# Altium PCB LPC55S69_MINI.PCBdoc (part 2 of 2)
Units mil, origin at the board's own origin, x right, y up, seen from the top; angles counter-clockwise.
Board outline 1610.03 x 1685.03 mil, 2 copper layers (Top Layer, Bottom Layer), stack 31.2 mil thick; 66 components, 51 nets, 267 pads, 110 vias.
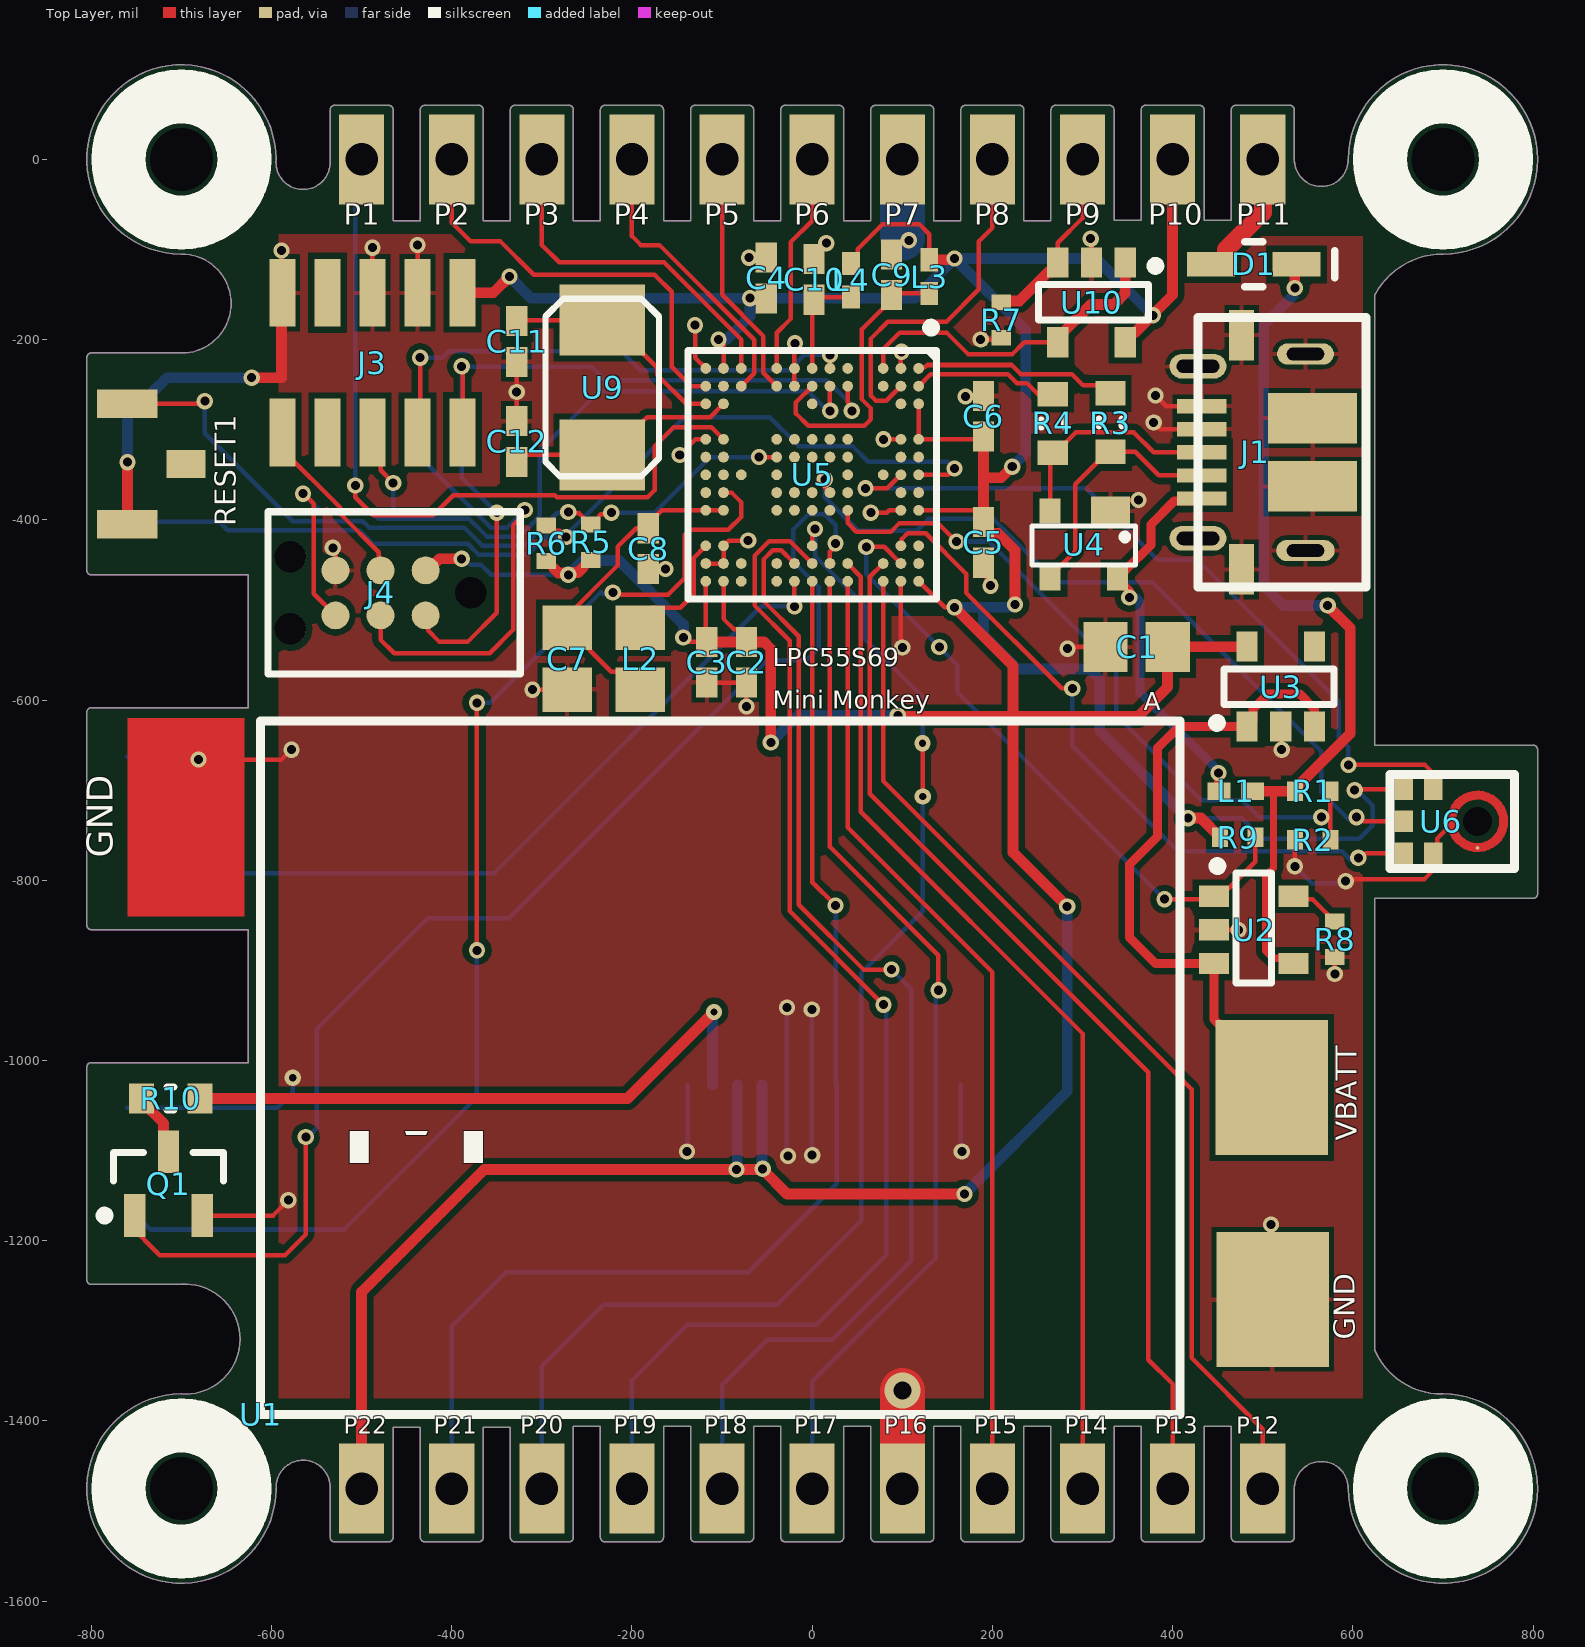
[diagram p0: Top Layer view]

## Via types
v1: diameter 18, hole 10, Top Layer to Bottom Layer, tented both sides, 105 vias
v2: diameter 18, hole 8, Top Layer to Bottom Layer, tented both sides, 4 vias
v3: diameter 40, hole 20, Top Layer to Bottom Layer, tented both sides, 1 vias

## Nets (pads, with @x,y where several pads share a name; then routed paths per layer and width w, separated by ;. In a path a pad name is that pad's centre, name@x,y a point inside that pad or via, vN(x,y) a via of type N, cw(c..) or ccw(c..) an arc to the next point about the centre after c; other vN are vias at no path point) (continued)
NetC7_2: (continued)
  Top Layer w5: C7.2 C7.2@-269.05,-519.55 ; L2.1 -211.03,-568.42 -223.13,-568.42 -246.94,-544.61 -246.94,-541.66 C7.2@-269.05,-519.55 ; U5.M9 U5.N9 -166.93,-389.37 -182,-404.44 C8.2 -182,-414.28 -186.92,-409.36 -195.36,-409.36 -216,-430 -216,-450.67 -276.97,-511.63 -270.52,-518.07 C7.2@-269.05,-519.55
NetC9_1: C9.1 L3.2 U5.G2 | length 338.6
  Top Layer w5: U5.G2 -18,-269.57 -18,-282 -4.5,-295.5 57.98,-295.5 65.24,-288.24 65.24,-276.38 55.24,-266.38 55.24,-188.32 88,-155.56 C9.1 89.94,-148.7 L3.2 130,-149.07 L3.2@122.66,-156.41
NetC10_2: C10.2 L4.2 U5.G1 | length 119.3
  Top Layer w5: U5.G1 0,-157.64 C10.2 4.94,-152.7 L4.2
NetC11_2: C11.2 U5.N3 U9.2 | length 253.7
  Top Layer w5: C11.2 -326.83,-178.2 U9.2 -224.8,-178.2 -172,-231 -172,-239.2 -139.94,-271.26 U5.N3
NetC12_2: C12.2 U5.M3 U9.1 | length 256.2
  Top Layer w5: C12.2 -320.17,-327.8 U9.1 -225.13,-327.8 -183.32,-286 -113.17,-286 U5.M3
NetD1_2: D1.2 L1.2 R1.1 U2.4 | length 958.8
  Top Layer w8: 511,-701.13 512,-702.13 512,-786.42 503.19,-795.23 503.19,-878.19 511.59,-886.59 528.48,-886.59 U2.4
  Top Layer w12: L1.2 511,-701.13 R1.1 538.44,-698.28 538.44,-695.56 597,-637 597,-520 v1(572,-495) ; v1(535.58,-142.58) 535.58,-118.02 D1.2
  Bottom Layer w12: v1(535.58,-142.58) 534.43,-143.73 534.43,-150.57 501,-184 501,-473.17 522.83,-495 v1(572,-495)
NetL2_2: L2.2 U5.N11 | length 130.4
  Top Layer w5: L2.2@-191,-510.55 -177.89,-497.44 -146.44,-497.44 -131.63,-482.63 -131.63,-442.26 U5.N11
NetP9_1: P9.1 R7.2 U10.3 | length 209.4
  Top Layer w5: U10.3 272.6,-92.4 300,-65 P9.1
  Top Layer w12: R7.2 211.42,-157.09 229.72,-157.09 261.87,-124.95 266.79,-124.95 272.6,-119.14 U10.3
NetQ1_3: Q1.3 R10.1 | length 79.2
  Top Layer w12: R10.1@-744.48,-1044.95 -719.73,-1069.7 -719.73,-1095.81 Q1.3 Q1.3@-714.4,-1090.57
NetR3_2: R3.2 U5.A1 | length 227.4
  Top Layer w5: U5.A1 119.26,-230.74 124.81,-230.74 127.41,-228.13 221.27,-228.13 231.27,-238.13 288.13,-238.13 300.83,-250.83 322.31,-250.83 R3.2
NetR4_2: R4.2 U5.A2 | length 163.7
  Top Layer w5: U5.A2 131.56,-238.13 217.13,-238.13 227.13,-248.13 238.13,-248.13 250.52,-260.52 R4.2
NetR5_1: R5.1 RESET1.2 U5.J6 | length 863.7
  Top Layer w5: RESET1.2 -676.73,-271.07 v1(-674,-268.34) ; v1(-270.66,-391.17) -269.25,-392.58 -258.73,-392.58 -254.33,-396.99 -254.33,-398.96 -247.97,-405.32 R5.1 -244.03,-405.32 -237.67,-398.96 -237.67,-396.99 -234.51,-393.82 -225.08,-393.82 -223.26,-392 v1(-223,-392) ; v1(-59,-330.32) U5.J6
  Bottom Layer w5: v1(-674,-268.34) -674,-304 -576.5,-401.5 -498.61,-401.5 -491.61,-408.5 -386.19,-408.5 -366.19,-428.5 -319.5,-428.5 -283.08,-392.08 -271.57,-392.08 v1(-270.66,-391.17) ; v1(-223,-392) -175,-392 -113.31,-330.32 v1(-59,-330.32)
NetR8_2: R8.2 U2.5 | length 58.5
  Top Layer w5: U2.5 537.92,-821.22 555.59,-821.22 571.67,-837.3 571.67,-839.27 578.03,-845.63 R8.2
NetR10_2: R10.2 U7.2 | length 691.9
  Top Layer w12: R10.2 -205,-1042 v2(-109,-946)
  Bottom Layer w12: U7.2 -110.71,-947.71 v2(-109,-946)
PIO0_15: P4.1 U5.L2 | length 325.7
  Top Layer w5: P4.1 -200,-85 -190,-95 -169.5,-95 -64.36,-200.13 -64.36,-237.2 U5.L2
PIO0_16: P5.1 U5.J2 | length 276.7
  Top Layer w5: P5.1 -100,-150.35 -54.36,-195.99 -54.36,-236.58 U5.J2
PIO0_23: P6.1 U5.J1 | length 248.2
  Top Layer w5: U5.J1 -39.37,-192.37 -24,-177 -24,-92 0,-68 P6.1
PIO0_24: P14.1 U5.E12 | length 1134.5
  Top Layer w5: U5.E12 54,-463.06 54,-724 300,-970 P14.1
PIO0_27: P2.1 U5.N2 | length 475.7
  Top Layer w5: P2.1 -400,-70 -379,-91 -346,-91 -309,-128 -175,-128 -156,-147 -156,-230 -134.43,-251.57 U5.N2
PIO0_31: P3.1 U5.L1 | length 391.7
  Top Layer w5: P3.1 -300,-95 -280.78,-114.22 -164.42,-114.22 -78.74,-199.9 U5.L1
PIO1_4: P8.1 U5.B2 | length 398.3
  Top Layer w5: U5.B2 82.27,-267.73 70.73,-267.73 65.24,-262.24 65.24,-198.76 84,-180 149.04,-180 185,-144.04 185,-91 200,-76 P8.1
PIO1_5: P1.1 U5.M5 | length 871.3
  Top Layer w5: v1(-507,-362) -507,-375 -487,-395 -420.84,-395 -398.34,-372.5 -285.52,-372.5 -283.35,-374.67 -182.65,-374.67 -175,-367.02 -175,-318.31 -153.69,-297 -112.06,-297 U5.M5
  Bottom Layer w5: v1(-507,-362) -507,-7 P1.1
PIO1_26: P15.1 U5.E13 | length 1073.4
  Top Layer w5: U5.E13 39.37,-741.37 200,-902 P15.1
RST: J3.10 J4.3 | length 198.1
  Top Layer w5: J3.10 -588,-322 -523.5,-386.5 -523.5,-393.5 -481.07,-435.93 -481.07,-453.93 J4.3
SWD_CLK: J3.4 J4.4 U5.F1 | length 1168.6
  Top Layer w5: J4.4 -479,-533 -464,-548 -358,-548 -332,-522 -332,-406 -323.67,-397.67 -323.67,-397.19 -319,-392.52 v1(-319,-389) ; J3.4 -435,-300 v1(-435,-220) ; U5.F1 v1(19.69,-217)
  Bottom Layer w5: v1(-319,-389) -338.5,-408.5 -356.83,-408.5 -435,-330.33 v1(-435,-220) -410.31,-220 -403.34,-213.03 -211.87,-213.03 -190.89,-234 -25.67,-234 -8.67,-217 v1(19.69,-217)
SWD_IO: J3.2 J4.2 U5.E2 | length 946.9
  Top Layer w5: J4.2 -426.24,-508.76 -426.24,-522.83 -414.07,-535 -382,-535 -350,-503 v1(-350,-392) ; v1(-389,-229.53) -388,-230.53 J3.2 ; U5.E2 39.37,-269.37 v1@42,-272
  Bottom Layer w5: v1(-350,-392) -389,-353 v1(-389,-229.53) -388.53,-230 -245,-230 -230,-245 16.26,-245 42,-270.74 v1@42,-272
  other v1: 44,-279
SWO: J3.6 J4.6 U5.F2 | length 1010.5
  Top Layer w5: v1(-565,-371) -564,-371 -553,-382 -553,-482 J4.6 ; J3.6 -478.93,-312.07 -478.93,-345.07 v1(-465,-359) ; v1@19,-280.63 19,-279 19.69,-278.32 U5.F2
  Bottom Layer w5: v1@-563,-369 v1(-565,-371) -544.5,-391.5 -488.5,-391.5 -481.5,-398.5 -465,-398.5 ; v1(-465,-359) -465,-398.5 ; v1@19,-280.63 18.63,-280.63 -5,-257 -236.08,-257 -302.5,-323.42 -302.5,-395.83 -325.17,-418.5 -360.98,-418.5 -380.98,-398.5 -465,-398.5
  other v1: 20,-279
"USB0 _VBUS": R1.2 R2.2 U5.E9 | length 776.1
  Top Layer w5: U5.E9 39.37,-403.37 49,-413 87.4,-413 96.4,-404 140,-404 v1(160,-424) ; v1(565,-730) 574.95,-730 ; R2.2 574.95,-730 ; R1.2 574.95,-730
  Bottom Layer w5: v1(160,-424) 196,-424 337.5,-565.5 337.5,-616.5 432,-711 477,-711 496,-730 v1(565,-730)
VBATT: pad.1 U2.3 U3.1 U3.3 | length 726.8
  Top Layer w10: pad.1 510,-1017.5 452.5,-960 451.57,-960 445.71,-954.14 U2.3 381.4,-892.4 352,-863 352,-782.63 383,-751.63 383,-653.39 407.09,-629.29 U3.1 489.41,-622.48 489.41,-609.59 506,-593 541,-593 557.4,-609.4 U3.3
pads on no net: BTN1.S BTN2.S BTN3.S J3.7 J3.8 J4.A J4.B J4.C RESET1.S U3.4 U5.A6 U5.A8 U5.A11 U5.A12 U5.B3 U5.B6 U5.B8 U5.C2 U5.C7 U5.E1 U5.E5 U5.E6 U5.E7 U5.E8 U5.F5 U5.F6 U5.F9 U5.G3 U5.G5 U5.G6 U5.G8 U5.G9 U5.H5 U5.H6 U5.H8 U5.H9 U5.J5 U5.J7 U5.J8 U5.J9 U5.J12 U5.J13 U5.L7 U5.L12 U5.L13 U5.M2 U5.M6 U5.M7 U5.N6 U5.N7 U5.N8 U6.PORT_HOLE

## Polygon pours and split planes (outlines as drawn)
GND on Bottom Layer "GND_L02_P000" (solid, remove dead copper, pour order 0): -591,-84.15 -591,-1375 609.2,-1375 609.2,-84.15
GND on Top Layer "GND_L01_P002" (solid, remove dead copper, pour order 2): -592,-83 -156,-83 -156,-507 149,-507 149,-85 611,-85 611,-1375 -592,-1375

## Keep-outs
Keep-Out Layer:
  lines w0.1: -699.97,-214.79 ccw(c-700,-219.8) -700,-214.79 -800,-214.79 ccw(c-800,-219.8) -805.01,-219.8 -805.01,-456.02 ccw(c-800,-456.02) -800,-461.04 -625.96,-461.04 -625.96,-608.49 -800,-608.49 ccw(c-800,-613.5) -805.01,-613.5 -805.01,-849.72 ccw(c-800,-849.72) -800,-854.74 -625.96,-854.74 -625.96,-1002.19 -800,-1002.19 ccw(c-800,-1007.2) -805.01,-1007.2 -805.01,-1243.43 ccw(c-800,-1243.43) -800,-1248.44 -700,-1248.44 ccw(c-700,-1243.43) -699.68,-1248.43 ; -699.97,-214.79 ccw(c-699.69,-159.9) -644.8,-159.9 ccw(c-699.69,-159.9) -699.97,-105.01 ; -699.97,-214.79 -699.97,-214.79 ; -699.97,-105.01 cw(c-700,-100) -700,-105.01 cw(c-700,0) -594.99,0 cw(c-600,0) -595.01,-0.49 ; -699.97,-105.01 -699.97,-105.01 ; -699.65,-1370 ccw(c-700,-1375) -700,-1369.99 ccw(c-700,-1475) -594.99,-1475 ccw(c-600,-1475) -594.99,-1474.8 ; -699.68,-1370 ccw(c-695.79,-1309.21) -699.65,-1370 ; -699.65,-1370 ccw(c-695.79,-1309.21) -634.88,-1309.21 ccw(c-695.79,-1309.21) -699.68,-1248.43 ; -699.68,-1370 -699.65,-1370 ; -699.68,-1248.43 -699.68,-1248.43 ; -594.99,-1474.8 cw(c-565,-1473.57) -534.99,-1473.57 cw(c-565,-1473.57) -535.01,-1474.8 ; -594.99,-1474.8 -594.99,-1474.8 ; -595.01,-0.49 cw(c-565,-3.21) -595.01,-0.46 -595.01,-0.49 ; -595.01,-0.49 ccw(c-565,-3.21) -534.87,-3.21 ccw(c-565,-3.21) -534.99,-0.49 ; -535.01,-1474.8 ccw(c-530,-1475) -535.01,-1475 -535.01,-1529.09 ccw(c-530,-1529.09) -530,-1534.11 -470,-1534.11 ccw(c-470,-1529.09) -464.99,-1529.09 -464.98,-1406.71 -435.01,-1406.71 -435.01,-1529.09 ccw(c-430,-1529.09) -430,-1534.11 -370,-1534.11 ccw(c-370,-1529.09) -364.99,-1529.09 -364.98,-1406.71 -335.01,-1406.71 -335.01,-1529.09 ccw(c-330,-1529.09) -330,-1534.11 -270,-1534.11 ccw(c-270,-1529.09) -264.99,-1529.09 -264.98,-1405.84 -235.01,-1405.84 -235.01,-1529.09 ccw(c-230,-1529.09) -230,-1534.11 -170,-1534.11 ccw(c-170,-1529.09) -164.99,-1529.09 -164.98,-1405.84 -135.01,-1405.84 -135.01,-1529.09 ccw(c-130,-1529.09) -130,-1534.11 -70,-1534.11 ccw(c-70,-1529.09) -64.99,-1529.09 -64.98,-1405.84 -35.01,-1405.84 -35.01,-1529.09 ccw(c-30,-1529.09) -30,-1534.11 30,-1534.11 ccw(c30,-1529.09) 35.01,-1529.09 35.02,-1405.84 64.99,-1405.84 64.99,-1529.09 ccw(c70,-1529.09) 70,-1534.11 130,-1534.11 ccw(c130,-1529.09) 135.01,-1529.09 135.02,-1405.84 164.99,-1405.84 164.99,-1529.09 ccw(c170,-1529.09) 170,-1534.11 230,-1534.11 ccw(c230,-1529.09) 235.01,-1529.09 235.02,-1405.84 264.99,-1405.84 264.99,-1529.09 ccw(c270,-1529.09) 270,-1534.11 330,-1534.11 ccw(c330,-1529.09) 335.01,-1529.09 335.02,-1405.84 364.99,-1405.84 364.99,-1529.09 ccw(c370,-1529.09) 370,-1534.11 430,-1534.11 ccw(c430,-1529.09) 435.01,-1529.09 435.02,-1405.84 464.99,-1405.84 464.99,-1529.09 ccw(c470,-1529.09) 470,-1534.11 530,-1534.11 ccw(c530,-1529.09) 535.01,-1529.09 535.02,-1475 cw(c565,-1475) 594.99,-1475 ccw(c700,-1475) 805.01,-1475 ccw(c700,-1475) 700,-1369.99 ccw(c700,-1375) 699.88,-1369.99 ; -535.01,-1474.8 -535.01,-1474.8 ; -534.99,-0.49 cw(c-530,0) -535.01,0 -535.01,55 cw(c-530,55) -530,60.01 -470,60.01 cw(c-470,55) -464.99,55 -464.98,-68.25 -435.01,-68.25 -435.01,55 cw(c-430,55) -430,60.01 -370,60.01 cw(c-370,55) -364.99,55 -364.98,-68.25 -335.01,-68.25 -335.01,55 cw(c-330,55) -330,60.01 -270,60.01 cw(c-270,55) -264.99,55 -264.98,-68.25 -235.01,-68.25 -235.01,55 cw(c-230,55) -230,60.01 -170,60.01 cw(c-170,55) -164.99,55 -164.98,-68.25 -135.01,-68.25 -135.01,55 cw(c-130,55) -130,60.01 -70,60.01 cw(c-70,55) -64.99,55 -64.98,-68.25 -35.01,-68.25 -35.01,55 cw(c-30,55) -30,60.01 30,60.01 cw(c30,55) 35.01,55 35.02,-68.25 64.99,-68.25 64.99,55 cw(c70,55) 70,60.01 130,60.01 cw(c130,55) 135.01,55 135.02,-68.25 164.99,-68.25 164.99,55 cw(c170,55) 170,60.01 230,60.01 cw(c230,55) 235.01,55 235.02,-68.25 264.99,-68.25 264.99,55 cw(c270,55) 270,60.01 330,60.01 cw(c330,55) 335.01,55 335.02,-67.39 364.99,-67.39 364.99,55 cw(c370,55) 370,60.01 430,60.01 cw(c430,55) 435.01,55 435.02,-67.39 464.99,-67.39 464.99,55 cw(c470,55) 470,60.01 530,60.01 cw(c530,55) 535.01,55 535.02,0 ccw(c565,0) 594.99,0 cw(c700,0) 805.01,0 cw(c700,0) 700,-105.01 ; -534.99,-0.49 -534.99,-0.49 ; 699.88,-1369.99 cw(c698.53,-1289.07) 624.23,-1321.15 624.23,-820.01 800,-820.01 ccw(c800,-815) 805.01,-815 805.02,-655 ccw(c800,-655) 800,-649.99 624.23,-649.99 624.23,-150.19 cw(c700.19,-191.46) 699.98,-105.02 ; 699.88,-1369.99 ccw(c698.53,-1289.07) 699.91,-1369.99 ; 699.88,-1369.99 699.91,-1369.99 ; 699.88,-1369.99 699.88,-1369.99 ; 700.01,-105.01 ccw(c700.19,-191.46) 699.98,-105.02 ; 700,-105.01 700.01,-105.01

## Other copper
Top Layer:
  rectangle net GND: -760,-840 -630,-620

## Silkscreen, mask and mechanical layers (free items; w line width, h text height)
Top Overlay:
  circle w60: c-700,-1475 r70
  circle w60: c700,-1475 r70
  circle w60: c700,0 r70
  circle w60: c-700,0 r70
  text "LPC55S69" at -44,-569 h35
  text "Mini Monkey" at -44,-616 h35
  text "A" at 368,-618 h35
  text "GND" at -766,-775 h50 r90
  text "VBATT" at 612,-1089 h40 r90
  text "GND" at 610,-1310 h40 r90
  text "M" at -535,-1332 h1150
Bottom Overlay:
  circle w60: c700,0 r70
  circle w60: c700,-1475 r70
  circle w60: c-700,0 r70
  circle w60: c-700,-1475 r70
  lines w15: 644,-769 713,-769 ; 644,-698 715,-698 ; 769,-800 cw(c769,-735) 769,-670 769,-800
  text "11" at 568,-65 h40
  text "1" at -531,-66 h40
  text "1" at -150,-1134 h75
  text "22" at -546,-1437 h40
  text "12" at 585,-1437 h40
[8] Board Outline:
  lines w1: -330,-1401.69 -370,-1401.69 -370,-1529.09 -430,-1529.09 -430,-1401.69 -470,-1401.69 -470,-1529.09 -530,-1529.09 -530,-1475 ccw(c-565,-1473.57) -600,-1475 cw(c-700,-1475) -700,-1375 ccw(c-695.79,-1309.21) -700,-1243.43 -800,-1243.43 -800,-1007.2 -620.94,-1007.2 -620.94,-849.72 -800,-849.72 -800,-613.5 -620.94,-613.5 -620.94,-456.02 -800,-456.02 -800,-219.8 -700,-219.8 ccw(c-699.69,-159.9) -700,-100 cw(c-700,0) -600,0 ccw(c-565,-3.21) -530,0 -530,55 -470,55 -470,-73.27 -430,-73.27 -430,55 -370,55 -370,-73.27 -330,-73.27 -330,55 -270,55 -270,-73.27 -230,-73.27 -230,55 -170,55 -170,-73.27 -130,-73.27 ; -330,-1400.83 -330,-1529.09 -270,-1529.09 -270,-1400.83 -230,-1400.83 -230,-1529.09 -170,-1529.09 -170,-1400.83 -130,-1400.83 -130,-1529.09 -70,-1529.09 -70,-1400.83 -30,-1400.83 -30,-1614.54 30,-1614.54 30,-1400.83 70,-1400.83 70,-1529.09 130,-1529.09 130,-1404.67 ; -130,-69.43 -130,55 -70,55 -70,-73.27 -30,-73.27 -30,55 30,55 30,-73.27 70,-73.27 70,55 130,55 130,-73.27 170,-73.27 170,55 230,55 230,-73.27 270,-73.27 270,55 330,55 330,-73.27 ; 130,-1400.83 170,-1400.83 170,-1529.09 230,-1529.09 230,-1400.83 270,-1400.83 270,-1529.09 330,-1529.09 330,-1400.83 370,-1400.83 370,-1529.09 430,-1529.09 430,-1400.83 470,-1400.83 470,-1529.09 530,-1529.09 530,-1475 cw(c565,-1475) 600,-1475 ccw(c700,-1475) 700,-1375 cw(c698.53,-1289.07) 619.21,-1322.17 619.21,-815 800,-815 800,-655 619.21,-655 619.21,-148.94 cw(c700.19,-191.46) 700,-100 ccw(c700,0) 600,0 cw(c565,0) 530,0 530,55 470,55 470,-72.4 430,-72.4 430,55 370,55 370,-72.4 330,-72.4 ; 530,-1400.83 ccw(c530.08,-1400.83) 530.08,-1400.91